# Altium PCB VECTOR_routed.PcbDoc (part 3 of 3)
Units mil, origin at the board's own origin, x right, y up, seen from the top; angles counter-clockwise.
Board outline 6000 x 4000 mil, 8 copper layers (Top Layer, Signal Layer 1, Signal Layer 2, Signal Layer 3, Signal Layer 4, VCC, Ground, Bottom Layer), stack 66.302 mil thick; 137 components, 274 nets, 1120 pads, 645 vias.
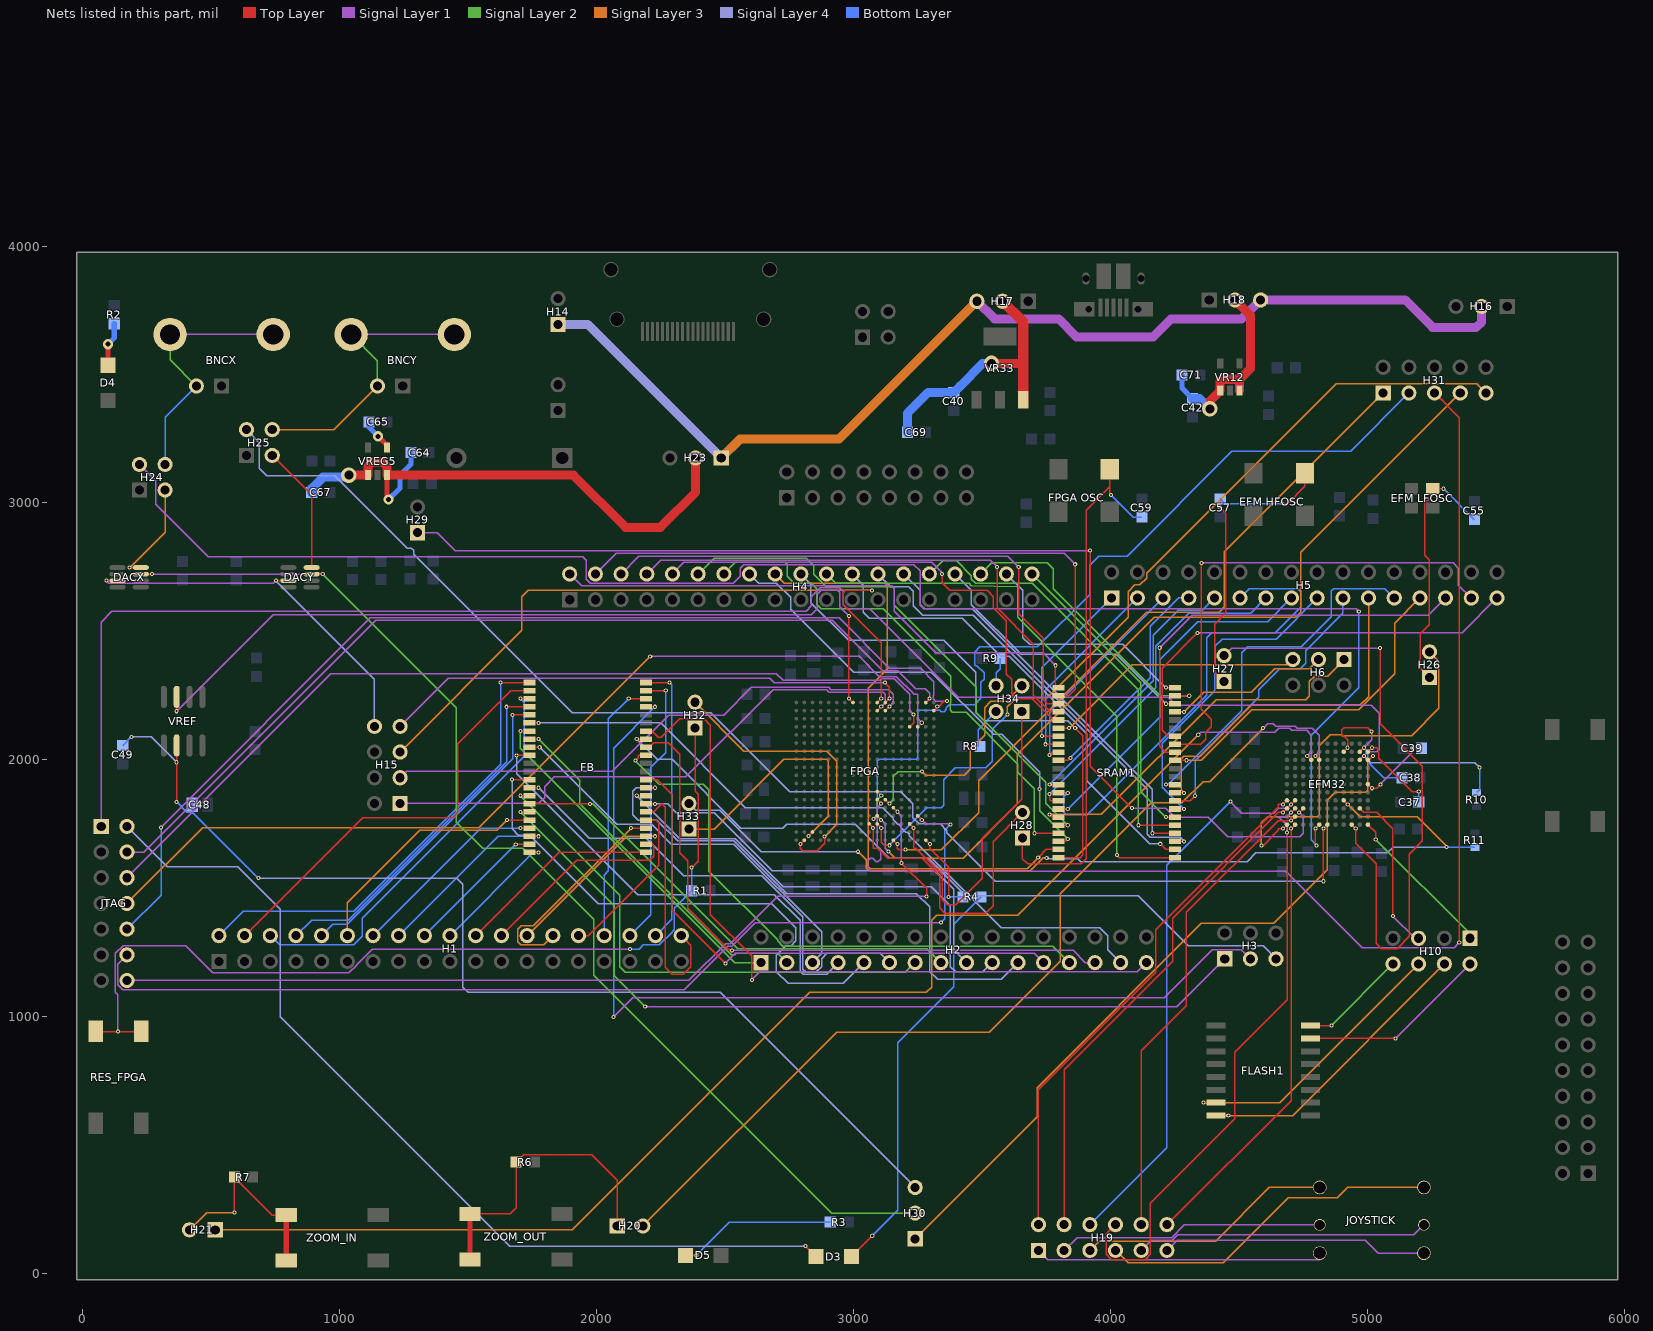
[diagram p9: the nets of this part, all layers, seen from the top]

## Via types
v1: diameter 16, hole 8, Top Layer to Bottom Layer, tented top, 295 vias
v2: diameter 16, hole 8, Top Layer to Bottom Layer, 264 vias
v3: diameter 40, hole 20, Top Layer to Bottom Layer, 75 vias
v4: diameter 60, hole 35, Top Layer to Bottom Layer, 10 vias
v5: diameter 40, hole 25, Top Layer to Bottom Layer, 1 vias

## Nets (pads, with @x,y where several pads share a name; then routed paths per layer and width w, separated by ;. In a path a pad name is that pad's centre, name@x,y a point inside that pad or via, vN(x,y) a via of type N, cw(c..) or ccw(c..) an arc to the next point about the centre after c; other vN are vias at no path point) (continued)
NetBNCX_2: BNCX.2 H24.4 | length 1000.1
  Signal Layer 1 w5: BNCX.2@339.21,3655.79 BNCX.2@740.79,3655.79
  Signal Layer 2 w5: BNCX.2@339.21,3655.79 339.21,3557.36 BNCX.2@441.57,3455
  Bottom Layer w5: H24.4@320,3150 320,3333.43 BNCX.2@441.57,3455
NetBNCY_2: BNCY.2 H25.4 | length 1124.8
  Signal Layer 1 w5: BNCY.2@1044.21,3655.79 BNCY.2@1445.79,3655.79
  Signal Layer 2 w5: BNCY.2@1044.21,3655.79 1146.57,3553.43 BNCY.2@1146.57,3455
  Signal Layer 3 w5: H25.4@737,3285 976.57,3285 BNCY.2@1146.57,3455
NetC37_1: C37.1 EFM32.B11 | length 335.4
  Top Layer w5: EFM32.B11@5002.48,2030.98 v1(5018.23,2046.73) 5036.34,2046.73 5045.28,2037.79 5045.28,2005 5174.28,1876 v2(5200.43,1876)
  Bottom Layer w5: C37.1@5200.43,1835 v2(5200.43,1876)
NetC38_2: C38.2 EFM32.B8 EFM32.B10 | length 543.9
  Top Layer w5: EFM32.B8@4907.99,2030.98 v1(4923.74,2046.73) 4923.74,2077.82 4901.56,2100 4901.56,2116 4910,2124.44 5002.56,2124.44 v2(5017,2110) ; EFM32.B10@4970.98,2030.98 v1(4986.73,2046.73) v1@4987,2047
  Signal Layer 1 w5: v1(4986.73,2046.73) 5002.48,2062.48 5017,2077 v2(5017,2110)
  Bottom Layer w5: v1@4987,2047 5002,2032 5002,1991.43 5063.43,1930 C38.2@5134.57,1930
NetC39_1: C39.1 EFM32.F11 | length 289.6
  Top Layer w5: EFM32.F11@5002.48,1905 v1(5018.23,1889.25) 5036.34,1889.25 v2(5051,1903.91)
  Signal Layer 1 w5: v2(5051,1903.91) 5174,2026.91 v2(5174,2045)
  Bottom Layer w5: v2(5174,2045) C39.1@5210.43,2045
NetC40_2: C40.2 C69.2 H17.2 VR33.3 | length 1135.4
  Top Layer w5: H17.2@3580,3785 3660.55,3704.45
  Top Layer w35: v4(3537,3543) 3660.55,3543
  Top Layer w40: H17.2@3580,3785 3660.55,3704.45 3660.55,3543 VR33.3@3660.55,3401.97
  Bottom Layer w35: C69.2@3209.57,3275 3209.57,3348.57 3291.43,3430.43 C40.2@3390,3430.43 3414.57,3455 3502.57,3543 v4(3537,3543)
NetC42_2: C42.2 C71.2 H18.2 VR12.1 VR12.3 | length 796.5
  Top Layer w5: v4@4387,3393.57 4391,3397.57
  Top Layer w35: v4(4387,3366) 4387,3396.25 VR12.1@4427.6,3436.85 4427.6,3472.6 4435,3480 4502.4,3480 ; H18.2@4485,3790 4546,3729 4546,3523.6 4502.4,3480 ; VR12.3@4502.4,3436.85 4502.4,3480
  Bottom Layer w20: C71.2@4278.57,3498 4278.57,3446.87 C42.2@4320,3405.43
  Bottom Layer w35: C42.2@4320,3405.43 4347.57,3405.43 v4(4387,3366)
NetC48_1: C48.1 C49.2 H30.3 VREF.6 | length 4243.9
  Top Layer w5: v2(365,1836) v2(365,1990.27) VREF.6@365,2055.51
  Signal Layer 4 w5: v2(188.57,2089) 266.27,2089 v2(365,1990.27) ; v2(682.94,1539) 1455,1539 1479,1515 1479,1115 1500,1094 2481,1094 H30.3@3240,335
  Bottom Layer w5: C49.2@155,2055.43 v2(188.57,2089) ; v2(365,1836) 404.53,1796.47 425.47,1796.47 ; C48.1@425.47,1825 425.47,1796.47 ; v2(682.94,1539) 425.47,1796.47
NetC55_2: "EFM LFOSC.3" C55.2 H26.1 | length 1004.3
  Top Layer w5: H26.1@5242.42,2320.16 5206,2356.58 5206,2490 5241,2525 5241,2778 5223,2796 5223,3009 5235,3009 5255.1,3029.1 5255.1,3054.97 v2(5297.18,3054.97)
  Bottom Layer w5: v2(5297.18,3054.97) C55.2@5417.42,2934.73
NetC57_2: "EFM HFOSC.3"@4757.42,3115.52 C57.2 H27.1 | length 1169.7
  Top Layer w5: v2(4427.42,2982) 4449.9,2959.52 4449.9,2571.9 4406,2528 4406,2341.58 H27.1@4442.42,2305.16 ; v2(4669,2997) 4690,2997 4757.42,3064.42 4757.42,3115.52
  Bottom Layer w5: v2(4427.42,2982) C57.2@4427.42,3015.6 4446.02,2997 v2(4669,2997)
NetC59_2: "FPGA OSC.3"@3997.42,3130.52 C59.2 H28.1 | length 2089.2
  Top Layer w5: H28.1@3657.42,1695.16 3657.42,1615 3677.42,1595 3886,1595 3906,1615 3906,2972 3997.42,3063.42 ; 3997.42,3130.52 3997.42,3063.42 ; v2(4003,3030) 3997.42,3035.58 3997.42,3063.42
  Bottom Layer w5: v2(4003,3030) 4088.27,2944.73 C59.2@4122.42,2944.73
NetC64_2: C64.2 C67.2 H23.2 VREG5.1 VREG5.3 | length 2203.8
  Top Layer w20: VREG5.3@1184.4,3107.87 1184.4,3018.6 v3(1190,3013)
  Top Layer w35: v4(1034.87,3107.87) 1065.87,3107.87 VREG5.1@1109.6,3107.87 1109.6,3142.6 1127,3160 1166,3160 1184.4,3141.6 VREG5.3@1184.4,3107.87 1909.54,3107.87 2112.4,2905 2248,2905 2385,3042 H23.2@2385,3175
  Bottom Layer w20: v3(1190,3013) 1234,3057 1234,3107 1276.57,3149.57 C64.2@1276.57,3196
  Bottom Layer w35: C67.2@890.57,3041 890.57,3055.57 934.97,3099.97 1026.97,3099.97 v4(1034.87,3107.87)
NetC65_2: C65.2 VREG5.4 | length 128.2
  Top Layer w20: v3(1149,3259) 1184.4,3223.6 VREG5.4@1184.4,3216.13
  Bottom Layer w20: C65.2@1113.57,3315 1113.57,3294.43 v3(1149,3259)
NetD3_1: D3.1 R4.1 | length 1609
  Top Layer w5: D3.1@2991.9,66 v2(3072.9,147)
  Bottom Layer w5: v2(3072.9,147) 3173,247.1 3173,899 3390,1116 3390,1359.57 R4.1@3496.43,1466
NetD3_2: D3.2 JTAG.2 | length 3621.9
  Top Layer w5: v2(2813.1,107) D3.2@2854.1,66
  Signal Layer 4 w5: JTAG.2@171.26,1740.55 327.81,1584 603,1584 769,1418 769,999 1661,107 v2(2813.1,107)
NetD4_1: D4.1 R2.1 | length 171.6
  Top Layer w20: D4.1@98,3535.9 v3(98,3618)
  Bottom Layer w20: v3(98,3618) 122,3642 R2.1@122,3697.57
NetD5_1: D5.1 R3.1 | length 617
  Top Layer w5: D5.1@2346.26,70.47 v2(2387.47,70.47)
  Bottom Layer w5: v2(2387.47,70.47) 2517,200 R3.1@2909.57,200
NetDACX_3: DACX.3 DACY.3 H30.2 | length 4476.7
  Top Layer w5: DACX.3@225.28,2722.8 v2(269,2722.8) ; DACY.3@890.28,2722.8 v2(933.71,2722.8)
  Signal Layer 1 w5: v2(269,2722.8) v2(933.71,2722.8)
  Signal Layer 2 w5: v2(933.71,2722.8) 1454,2202.51 1454,1757 1556,1655 1712,1655 1988,1379 1988,1162 2915,235 H30.2@3240,235
NetDACX_4: DACX.4 H24.3 | length 402.1
  Top Layer w5: v2(182,2748.39) DACX.4@225.28,2748.39
  Signal Layer 3 w5: v2(182,2748.39) 320,2886.39 H24.3@320,3050
NetDACY_4: DACY.4 H25.3 | length 500.1
  Top Layer w5: H25.3@737,3185 890.28,3031.72 DACY.4@890.28,2748.39
NetEFM32_C4: EFM32.C4 H21.1 | length 5348.7
  Top Layer w5: v1(4766.26,2015.24) EFM32.C4@4782.01,1999.49
  Signal Layer 1 w5: v2(4342.11,2097.38) 4351.48,2106.75 4427.25,2106.75 4427.88,2107.38 4639.46,2107.38 4654.46,2122.38 4697.38,2122.38 4705.54,2114.21 4764.13,2114.21 4782.01,2096.34 4782.01,2030.98 v1(4766.26,2015.24)
  Signal Layer 3 w5: H21.1@515,170 1905,170 2830,1095 3284,1095 3304,1115 3304,1375 3324,1395 3639.73,1395 v2(4342.11,2097.38)
NetEFM32_C5: EFM32.C5 H20.2 | length 3726
  Top Layer w5: v1(4797.76,2015.24) EFM32.C5@4813.5,1999.49
  Signal Layer 1 w5: v2(4594.15,2123.15) 4611.85,2140.85 4634,2140.85 4643.54,2131.31 4719,2131.31 4727.16,2123.15 4786.69,2123.15 4813.5,2096.34 4813.5,2030.98 v1(4797.76,2015.24)
  Signal Layer 3 w5: H20.2@2180,185 2935,940 3529,940 3804,1215 3804,1478 4158.44,1832.44 4278.24,1832.44 4360.8,1915 4386,1915 v2(4594.15,2123.15)
NetEFM32_C10: EFM32.C10 JTAG.1 R10.2 | length 6883.5
  Top Layer w5: EFM32.C10@4970.98,1999.49 v1(4986.73,2015.24)
  Signal Layer 1 w5: JTAG.1@71.26,1740.55 71.26,2536.26 113,2578 2815,2578 2836,2599 2836,2635.21 2869.98,2669.19 2945,2669.19 2959,2655.19 2959,2603 2975,2587 3063.56,2587 3407.47,2243.1 4224.9,2243.1 4255,2213 5015,2213 5046,2182 5046,2040.65 5036.34,2030.98 5002.48,2030.98 v1(4986.73,2015.24)
  Signal Layer 4 w5: v1(4986.73,2015.24) 5012.97,1989 5418,1989 v2(5437,1970)
  Bottom Layer w5: R10.2@5426,1872.56 5437,1883.56 v2(5437,1970)
NetEFM32_C11: EFM32.C11 H30.1 | length 2879
  Top Layer w5: EFM32.C11@5002.48,1999.49 5006.49,1999.49 v1(5022,2015)
  Signal Layer 3 w5: H30.1@3240,135 3715,610 3715,724 4354,1363 4635,1363 4844,1572 4844,1842 4875,1873 4995,1873 5002,1880 5002,1995 v1(5022,2015)
NetEFM32_H1: EFM32.H1 H19.2 | length 2063.4
  Top Layer w5: H19.2@3720,190 3720,716 4176,1172 4176,1338.24 4653.66,1815.91 4653.66,1826.26 v1(4671.77,1826.26) EFM32.H1@4687.52,1842.01
NetEFM32_H2: EFM32.H2 H19.6 | length 2164.1
  Top Layer w5: v1(4703.27,1826.26) EFM32.H2@4719.02,1842.01
  Signal Layer 1 w5: v2(4467.49,1837) 4511.86,1792.62 4635.77,1792.62 4653.66,1810.51 4687.52,1810.51 v1(4703.27,1826.26)
  Bottom Layer w5: H19.6@3920,190 4219,489 4219,1588.51 v2(4467.49,1837)
NetEFM32_H8: EFM32.H8 H33.2 R11.1 | length 3717.5
  Top Layer w5: EFM32.H8@4907.99,1842.01 v1(4924,1826)
  Signal Layer 3 w5: v2(3018,1642) 3049.06,1610.94 3049.06,1579.3 3061.3,1567.06 3687.48,1567.06 3738.42,1618 v2(3752,1618) ; v1(4924,1826) 4972,1778 5195,1778 5309,1664 v2(5309,1660)
  Signal Layer 4 w5: H33.2@2359,1830 2386.06,1802.94 2479.42,1802.94 2640.36,1642 v2(3018,1642) ; v2(3752,1618) 3752,1617 3754,1615 3873.72,1615 3885.16,1603.56 4533.15,1603.56 4566.65,1637.06 5078.7,1637.06 5101.64,1660 v2(5309,1660)
  Bottom Layer w5: v2(5309,1660) 5418.44,1660 R11.1@5419,1659.44
NetEFM32_J1: EFM32.J1 H19.4 | length 1990.5
  Top Layer w5: H19.4@3820,190 3820,793 4242,1215 4242,1383.1 4653.66,1794.76 v1(4671.77,1794.76) EFM32.J1@4687.52,1810.51
NetEFM32_J2: EFM32.J2 H19.8 | length 2336.3
  Top Layer w5: H19.8@4020,190 3984,154 3984,75 4005,54 4135,54 4156,75 4156,274 4484,602 4484,862 4688,1066 v1(4688,1717) ; v1(4703.27,1794.76) EFM32.J2@4719.02,1810.51
  Signal Layer 1 w5: v1(4688,1717) 4688,1744.68 4653.66,1779.02 4687.52,1779.02 v1(4703.27,1794.76)
NetEFM32_J3: EFM32.J3 H29.1 | length 4544.1
  Top Layer w5: v2(3921,2814) 3921,1975 v2(4084,1812) ; v1(4734.76,1794.76) EFM32.J3@4750.51,1810.51
  Signal Layer 1 w5: H29.1@1303,2884 1380,2884 1450,2814 v2(3921,2814) ; v2(4084,1812) 4215,1812 4250.94,1776.06 4380.94,1776.06 4456,1701 4737.85,1701 4750.51,1713.66 4750.51,1779.02 v1(4734.76,1794.76)
NetEFM32_K2: EFM32.K2 H19.10 | length 1866.2
  Top Layer w5: H19.10@4120,190 4120,867 4296,1043 4296,1405.61 4653.66,1763.27 v1(4703.27,1763.27) EFM32.K2@4719.02,1779.02
NetEFM32_L1: EFM32.L1 H26.2 | length 1498.1
  Top Layer w5: v2(4588,1666) 4594.66,1666 4653.66,1725 4653.66,1731.77 v1(4671.77,1731.77) EFM32.L1@4687.52,1747.52
  Signal Layer 3 w5: v2(4588,1666) 4588,1755 4612,1779 4807,1779 4813,1785 4813,2055 4855.71,2097.71 4897.85,2097.71 4901.56,2094 5173,2094 5279,2200 5279,2383.58 H26.2@5242.42,2420.16
NetEFM32_L2: EFM32.L2 H19.12 | length 1764.2
  Top Layer w5: H19.12@4220,190 4703.27,673.27 4703.27,1713.66 v1(4703.27,1731.77) EFM32.L2@4719.02,1747.52
NetEFM32_L5: EFM32.L5 H24.2 | length 6322.9
  Top Layer w5: v2(4803,1666) 4797.76,1671.24 4797.76,1713.66 v1(4797.76,1731.77) EFM32.L5@4813.5,1747.52
  Signal Layer 1 w5: H24.2@220,3150 284,3086 284,2995 488,2791 1945,2791 1959,2777 1959,2703 1975,2687 2531,2687 2559,2715 2559,2745 2573,2759 3235,2759 3259,2735 3259,2603 3275,2587 4957,2587 v2(4967,2577)
  Bottom Layer w5: v2(4803,1666) 4781,1688 4781,2095 4967,2281 v2(4967,2577)
NetEFM32_L6: EFM32.L6 H25.2 | length 5252.6
  Top Layer w5: v2(4829,1527) 4829.25,1527.25 4829.25,1713.66 v1(4829.25,1731.77) EFM32.L6@4845,1747.52
  Signal Layer 4 w5: H25.2@637,3285 687,3235 687,3134 715,3106 981,3106 1263.54,2823.46 1278.98,2823.46 1287.44,2815 1287.44,2799.56 1904,2183 2444,2183 2751,1876 3183,1876 3230,1829 3230,1775 3255,1750 3338,1750 3363.7,1724.3 3363.7,1715 3551.7,1527 v2(4829,1527)
NetEFM32_L9: EFM32.L9 H27.2 | length 2491.2
  Top Layer w5: EFM32.L9@4939.49,1747.52 v1(4955.24,1731.77) 4955.24,1713.66 4955.24,1675.76 5035,1596 5035,1285 5055,1265 5117,1265 5164,1312 5164,1633 5215,1684 5215,1975 5050,2140 v2(5050,2435)
  Signal Layer 1 w5: H27.2@4442.42,2405.16 4472.26,2435 v2(5050,2435)
NetFB_1: FB.1 H1.2 | length 1804.2
  Top Layer w5: v2(1626,2300.71) FB.1@1738.62,2300.71
  Bottom Layer w5: H1.2@529.33,1315.16 624.17,1410 1054,1410 1626,1982 v2(1626,2300.71)
NetFB_2: FB.2 H1.4 | length 1661.6
  Top Layer w5: H1.4@629.33,1315.16 1089.17,1775 1439,1775 1459,1795 1459,2063.21 1665,2269.21 FB.2@1738.62,2269.21
NetFB_3: FB.3 H1.6 | length 1615.8
  Top Layer w5: v2(1703.28,2238) 1703.57,2237.72 FB.3@1738.62,2237.72
  Bottom Layer w5: H1.6@729.33,1315.16 765.49,1279 1055,1279 1088,1312 1088,1383 1718,2013 1718,2223.28 v2(1703.28,2238)
NetFB_4: FB.4 H1.8 | length 1403.9
  Top Layer w5: v2(1649,2206.22) FB.4@1738.62,2206.22
  Bottom Layer w5: H1.8@829.33,1315.16 890.17,1376 1033,1376 1649,1992 v2(1649,2206.22)
NetFB_5: FB.5 H1.10 | length 1265.7
  Top Layer w5: v2(1673,2174.72) FB.5@1738.62,2174.72
  Bottom Layer w5: H1.10@929.33,1315.16 973.17,1359 1028.64,1359 1673,2003.36 v2(1673,2174.72)
NetFB_6: FB.18 H1.12 | length 970.8
  Top Layer w5: v2(1650.28,1765.28) FB.18@1738.62,1765.28
  Signal Layer 3 w5: H1.12@1029.33,1315.16 1029.33,1443.33 1312,1726 1611,1726 v2(1650.28,1765.28)
NetFB_7: FB.19 H1.14 | length 782.7
  Top Layer w5: v2(1703,1733.78) FB.19@1738.62,1733.78
  Bottom Layer w5: H1.14@1129.33,1315.16 1547.95,1733.78 v2(1703,1733.78)
NetFB_8: FB.20 H1.16 | length 740.4
  Top Layer w5: FB.20@1738.62,1702.28 1773.72,1702.28 v2(1774,1702)
  Bottom Layer w5: H1.16@1229.33,1315.16 1616.17,1702 v2(1774,1702)
NetFB_9: FB.21 H1.18 | length 556.6
  Top Layer w5: v2(1684.96,1670.79) FB.21@1738.62,1670.79
  Bottom Layer w5: H1.18@1329.33,1315.16 v2(1684.96,1670.79)
NetFB_10: FB.22 H1.20 | length 514.3
  Top Layer w5: FB.22@1738.62,1639.29 1773.71,1639.29 v2(1774,1639)
  Bottom Layer w5: H1.20@1429.33,1315.16 1753.17,1639 v2(1774,1639)
NetFB_11: FB.23 H1.22 | length 796.3
  Top Layer w5: H1.22@1529.33,1315.16 1853.46,1639.29 FB.23@2191.38,1639.29
NetFB_12: FB.24 H1.24 | length 794
  Top Layer w5: H1.24@1629.33,1315.16 1922.17,1608 2205,1608 2222,1625 2222,1665 2216.21,1670.79 FB.24@2191.38,1670.79
NetFB_13: FB.25 H1.26 | length 693.6
  Top Layer w5: FB.25@2191.38,1702.28 2226.72,1702.28 v2(2227,1702)
  Signal Layer 3 w5: H1.26@1729.33,1315.16 2116.17,1702 v2(2227,1702)
NetFB_14: FB.26 H1.28 | length 865.9
  Top Layer w5: v2(2133.78,1733.78) FB.26@2191.38,1733.78
  Signal Layer 3 w5: H1.28@1829.33,1315.16 1793.17,1279 1705,1279 1693.36,1290.64 1693.36,1339.36 1707,1353 1753,1353 v2(2133.78,1733.78)
NetFB_15: FB.27 H1.30 | length 646.4
  Top Layer w5: H1.30@1929.33,1315.16 1967.16,1315.16 2242,1590 2242,1755 2231.72,1765.28 FB.27@2191.38,1765.28
NetFB_16: FB.42 H1.32 | length 1028.6
  Top Layer w5: v2(2125,2237.72) FB.42@2191.38,2237.72
  Bottom Layer w5: H1.32@2029.33,1315.16 2029.33,1550.33 2046,1567 2046,2158.72 v2(2125,2237.72)
NetFB_17: FB.43 H1.34 | length 1090.6
  Top Layer w5: FB.43@2191.38,2269.21 2268.21,2269.21 v2(2269,2270)
  Bottom Layer w5: H1.34@2129.33,1315.16 2211,1396.83 2211,1970 2269,2028 v2(2269,2270)
NetFB_18: FB.44 H1.36 | length 1108.3
  Top Layer w5: FB.44@2191.38,2300.71 v2(2284,2300.71)
  Bottom Layer w5: H1.36@2229.33,1315.16 2293,1378.83 2293,2291.71 v2(2284,2300.71)
NetFB_19: FB.28 H1.38 | length 976.3
  Top Layer w5: FB.28@2191.38,1796.77 2223,1796.77 2254.23,1828 2255,1828 2267.56,1815.44 2267.56,1192.44 2295,1165 2337,1165 2367,1195 2367,1277.49 H1.38@2329.33,1315.16
NetFB_24: FB.7 H2.1 | length 1385.8
  Top Layer w5: v2(1703,2111.73) FB.7@1738.62,2111.73
  Signal Layer 2 w5: v2(1703,2111.73) 1703,2044 2537,1210 H2.1@2640,1210
NetFB_25: FB.8 H2.3 | length 1420.3
  Top Layer w5: FB.8@1738.62,2080.24 v2(1774,2080.24)
  Signal Layer 2 w5: v2(1774,2080.24) 1935,1919.24 1935,1828 2523,1240 2537,1240 2543,1246 2704,1246 H2.3@2740,1210
NetFB_26: FB.9 H2.5 | length 1570
  Top Layer w5: FB.9@1738.62,2048.74 v2(1778.26,2048.74)
  Signal Layer 4 w5: v2(1778.26,2048.74) 2078,1749 2214,1749 2291,1672 2534,1672 2876,1330 2876,1246 H2.5@2840,1210
NetFB_27: FB.10 H2.7 | length 1831.3
  Top Layer w5: v2(1688,2017.24) FB.10@1738.62,2017.24
  Signal Layer 4 w5: v2(1688,2017.24) 1688,1946 2159,1475 2692,1475 2791.92,1375.08 2791.92,1178.17 2805,1165.1 2895.1,1165.1 H2.7@2940,1210
NetFB_28: FB.13 H2.9 | length 2130.1
  Top Layer w5: v2(1671,1922.76) FB.13@1738.62,1922.76
  Signal Layer 4 w5: v2(1671,1922.76) 1671,1731 1695,1707 1739,1707 2006,1440 2681.93,1440 2775.97,1345.97 2775.97,1295 2755,1274.03 2735,1274.03 2700,1239.03 2700,1175 2745.44,1129.56 2959.56,1129.56 H2.9@3040,1210
NetFB_29: FB.14 H2.11 | length 1880.2
  Top Layer w5: FB.14@1738.62,1891.26 1773.74,1891.26 v2(1774,1891)
  Signal Layer 4 w5: v2(1774,1891) 1970.56,1694.44 2192.56,1694.44 2339,1548 2643,1548 2803,1388 2803,1185 2813.97,1174.03 2855,1174.03 2875.97,1195 2875.97,1225.97 2896,1246 3104,1246 H2.11@3140,1210
NetFB_30: FB.15 H2.13 | length 2036.9
  Top Layer w5: v2(1703,1860) 1703.24,1859.76 FB.15@1738.62,1859.76
  Signal Layer 2 w5: v2(1703,1860) 2090,1473 2090,1194 2112,1172 3202,1172 H2.13@3240,1210
NetFB_31: FB.16 H2.15 | length 1857.5
  Top Layer w5: FB.16@1738.62,1828.27 v2(1974.51,1828.27)
  Signal Layer 2 w5: v2(1974.51,1828.27) 1985.61,1828.27 2548.78,1265.1 3284.9,1265.1 H2.15@3340,1210
NetFB_32: FB.29 H2.17 | length 1642.3
  Top Layer w5: FB.29@2191.38,1828.27 2226.73,1828.27 v2(2227,1828)
  Signal Layer 4 w5: v2(2227,1828) 2276,1828 2310,1794 2457,1794 2683,1568 3316.89,1568 3390,1494.89 3390,1260 H2.17@3440,1210
NetFB_33: FB.30 H2.19 | length 1857.4
  Top Layer w5: v2(2156,1860) 2156.24,1859.76 FB.30@2191.38,1859.76
  Signal Layer 4 w5: v2(2156,1860) 2323,1693 2539,1693 2726,1506 3302,1506 3376,1432 3376,1195 3397,1174 3504,1174 H2.19@3540,1210
NetFB_34: FB.31 H2.21 | length 2158.2
  Top Layer w5: FB.31@2191.38,1891.26 2226.74,1891.26 v2(2227,1891)
  Signal Layer 4 w5: v2(2227,1891) 2155,1891 2141,1877 2141,1785 2161.5,1764.5 2234.5,1764.5 2315,1684 2534.64,1684 2739.64,1479 3245,1479 3297,1427 3297,1175 3327,1145 3575,1145 H2.21@3640,1210
NetFB_35: FB.32 H2.23 | length 2139.6
  Top Layer w5: FB.32@2191.38,1922.76 2235,1922.76 2292.44,1865.32 2292.44,1415.56 v2(2501,1207)
  Signal Layer 1 w5: v2(2501,1207) 2540,1246 3704,1246 H2.23@3740,1210
NetFB_36: FB.35 H2.25 | length 2257.8
  Top Layer w5: v2(2151,1997) 2161,2007 2161,2017.24 FB.35@2191.38,2017.24
  Signal Layer 2 w5: v2(2151,1997) 2243,1905 2415,1905 2437,1883 2437,1566 2704,1299 2704,1295 2724.97,1274.03 3775.97,1274.03 H2.25@3840,1210
NetFB_37: FB.36 H2.27 | length 2459
  Top Layer w5: FB.36@2191.38,2048.74 2204,2048.74 2222,2066.74 2278.32,2066.74 2323,2022.06 2323,1637 2354,1606 2354,1421 2526.84,1248.16 v2(2526.84,1258.16)
  Signal Layer 1 w5: v2(2526.84,1258.16) 3854.84,1258.16 3903,1210 H2.27@3940,1210
NetFB_38: FB.37 H2.29 | length 2325.3
  Top Layer w5: v2(2156,2080.24) FB.37@2191.38,2080.24
  Signal Layer 4 w5: v2(2156,2080.24) 2235.24,2001 2294,2001 2561.44,1733.56 2724.44,1733.56 2740.44,1749.56 3006.77,1749.56 3139.08,1617.26 3290.33,1617.26 3446.53,1461.06 3459.3,1461.06 3574.36,1346 3959,1346 3990,1315 3990,1260 H2.29@4040,1210
NetFB_39: FB.38 H2.31 | length 2924.1
  Top Layer w5: FB.38@2191.38,2111.73 2216.27,2111.73 2240,2088 2252,2088 2324,2160 2418,2160 2443,2135 2443,1397 2604,1236 v2(2604,1143)
  Signal Layer 1 w5: v2(2604,1143) 2635,1174 4104,1174 H2.31@4140,1210
NetFB_40: FB.17 H3.1 | length 3328.1
  Top Layer w5: v2(1703,1797) 1703.23,1796.77 FB.17@1738.62,1796.77
  Signal Layer 1 w5: v2(2189,1039) 4259,1039 H3.1@4445,1225
  Signal Layer 2 w5: v2(1703,1797) 2068,1432 2068,1160 v2(2189,1039)
NetFB_41: FB.41 H3.3 | length 3912
  Top Layer w5: FB.41@2191.38,2206.22 v2(2227,2206.22)
  Signal Layer 1 w5: v2(2066,999) 2141,1074 4210,1074 4397,1261 4509,1261 H3.3@4545,1225
  Bottom Layer w5: v2(2066,999) 2066,2045.22 v2(2227,2206.22)
NetFB_44: FB.6 H3.5 | length 3296.4
  Top Layer w5: FB.6@1738.62,2143.23 v2(1774,2143.23)
  Signal Layer 4 w5: v2(1774,2143.23) 2248.65,2143.23 2578.88,1813 3112.93,1813 3153.93,1772 3153.93,1766.3 3171.79,1748.44 3176.98,1748.44 3185.44,1739.98 3185.44,1734.79 3202.76,1717.47 3208.46,1717.47 3216.92,1709.01 3216.92,1703.31 3450.23,1470 4109,1470 4304,1275 4595,1275 H3.5@4645,1225
NetFLASH1_1: FLASH1.15 H10.2 | length 741.1
  Top Layer w5: FLASH1.15@4779.06,915 v2(5110,915)
  Signal Layer 1 w5: v2(5110,915) H10.2@5400,1205
NetFLASH1_2: FLASH1.8 H10.4 | length 1133.4
  Top Layer w5: FLASH1.8@4410.94,615 v2(4459,615)
  Signal Layer 3 w5: v2(4459,615) 4710,615 H10.4@5300,1205
NetFLASH1_5: FLASH1.7 H10.6 | length 1108.6
  Top Layer w5: v2(4363,665) FLASH1.7@4410.94,665
  Signal Layer 3 w5: v2(4363,665) 4660,665 H10.6@5200,1205
NetFLASH1_6: FLASH1.16 H10.8 | length 420.4
  Top Layer w5: FLASH1.16@4779.06,965 v2(4860,965)
  Signal Layer 2 w5: v2(4860,965) H10.8@5100,1205
NetFPGA_A8: FPGA.A8 VREF.3 | length 3319.4
  Top Layer w5: v2(365,2189) VREF.3@365,2244.49 ; v2(2982.01,2559.85) 2982.01,2254.8 v1(2982.01,2238.46) FPGA.A8@2997.76,2222.72
  Signal Layer 1 w5: v2(365,2189) 740,2564 2835,2564 2858.43,2587.43 2858.43,2645 2873.68,2660.25 2937.56,2660.25 2945.86,2651.95 2945.86,2596 v2(2982.01,2559.85)
NetFPGA_A11: FPGA.A11 H15.5 | length 2786.8
  Top Layer w5: v2(3072,2659) 2967,2659 2959.11,2651.11 2959.11,2603.89 3107.56,2455.44 3107.56,2286 3107.99,2254.8 v1(3107.99,2238.46) FPGA.A11@3092.24,2222.72
  Signal Layer 3 w5: H15.5@1235,2030 1709,2504 1709,2635 1733,2659 v2(3072,2659)
NetFPGA_A12: FPGA.A12 H15.7 | length 2062.9
  Top Layer w5: v2(3122,2300) 3139.49,2282.51 3139.49,2254.8 v1(3139.49,2238.46) FPGA.A12@3123.74,2222.72
  Signal Layer 1 w5: H15.7@1235,2130 1422,2317 2674,2317 2691.35,2299.65 3050.62,2299.65 ; 3050.65,2299.62 3121.62,2299.62 v2(3122,2300)
NetFPGA_A17: FPGA.A17 JTAG.4 | length 3658.2
  Top Layer w5: FPGA.A17@3281.22,2222.72 3296,2237.5 v1(3296,2238)
  Signal Layer 1 w5: JTAG.4@171.26,1640.55 237.55,1640.55 1140,2543 2918.02,2543 3114.02,2347 3171.62,2347 3243.06,2275.56 3278.73,2275.56 3296,2258.29 v1(3296,2238)
NetFPGA_B11: FPGA.B11 H15.1 | length 2181.5
  Top Layer w5: FPGA.B11@3092.24,2191.22 v1(3107.99,2206.97)
  Signal Layer 1 w5: H15.1@1235,1830 1775,1830 1797,1852 1797,1895 1835,1933 2347,1933 2686.84,2272.84 2895.04,2272.84 2904.14,2263.74 3114.8,2263.74 3123.74,2254.8 3123.74,2222.72 v1(3107.99,2206.97)
NetFPGA_B12: FPGA.B12 H15.3 | length 2153.7
  Top Layer w5: FPGA.B12@3123.74,2191.22 v1(3139.49,2206.97)
  Signal Layer 1 w5: H15.3@1235,1930 1260,1955 2061.12,1955 2280.12,2174 2494,2174 2601.78,2281.78 2902.72,2281.78 2911.38,2273.12 3136.91,2273.12 3155.24,2254.8 3155.24,2222.72 v1(3139.49,2206.97)
NetFPGA_B18: FPGA.B18 JTAG.10 | length 4088.9
  Top Layer w5: FPGA.B18@3312.72,2191.22 3326,2204.5 v1(3326,2207) ; v1@3331.03,2206.97 3352.06,2228 v2(3364,2228)
  Signal Layer 1 w5: v2(304,1737) 1119,2552 2944,2552 3140,2356 3261,2356 3313,2304 3313,2251.42 3310.56,2248.98 3310.56,2237.02 3319.58,2228 v2(3364,2228)
  Bottom Layer w5: JTAG.10@171.26,1340.55 304,1473.29 v2(304,1737)
NetFPGA_D15: FPGA.D15 JTAG.6 | length 3553.3
  Top Layer w5: FPGA.D15@3218.23,2128.23 3233.98,2143.98 v1(3233.98,2175.98)
  Signal Layer 1 w5: JTAG.6@171.26,1540.55 964.71,2334 2700,2334 2725.41,2308.59 3059.53,2308.59 ; 3059.56,2308.56 3103.62,2308.56 3109.94,2314.87 3158.16,2314.87 3218.23,2254.8 3218.23,2191.72 v1(3233.98,2175.98)
NetFPGA_D16: FPGA.D16 JTAG.8 | length 3677.7
  Top Layer w5: FPGA.D16@3249.72,2128.23 v1(3265.47,2143.98)
  Signal Layer 1 w5: v2(2208.44,2402.44) 3021.31,2402.44 3099.94,2323.81 3166.98,2323.81 3235.99,2254.8 3249.72,2254.8 3249.72,2159.72 v1(3265.47,2143.98)
  Signal Layer 3 w5: JTAG.8@171.26,1440.55 465.71,1735 1541,1735 v2(2208.44,2402.44)
NetFPGA_M11: FPGA.M11 H31.3 | length 3356.6
  Top Layer w5: FPGA.M11@3092.24,1876.26 v1(3107.99,1860.51)
  Signal Layer 2 w5: v1(3077,1769) 3092.24,1784.24 3092.24,1844.76 v1(3107.99,1860.51)
  Bottom Layer w5: v1(3077,1769) 3093,1785 3093,1822.58 3092.56,1823.02 3092.56,1994.56 3100,2002 3245,2002 3250,2007 3250,2187 3255,2192 3336.23,2192 3340.58,2187.65 3352.54,2187.65 3361,2196.1 3361,2203 3373,2215 3472,2215 3496,2239 3496,2301 3509,2314 3509,2338 3480.09,2366.91 3475.25,2366.91 3471.48,2370.68 3471.48,2419.32 3491.16,2439 3716,2439 3922,2645 3922,2760 3955,2793 4065,2793 4473,3201 4935,3201 H31.3@5162,3428
NetFPGA_N11: FPGA.N11 H31.5 | length 4962.1
  Top Layer w5: FPGA.N11@3092.24,1844.76 3107,1830.01 v1(3107,1829) ; H31.5@5262,3428 5358,3332 v2(5358,1289)
  Signal Layer 1 w5: v1(3107,1829) 3107,1828.02 3092.24,1813.27 3092.24,1655.2 3092.68,1654.76 3095,1654.76 3105.44,1644.32 3105.44,1613 3095,1602.56 3089,1602.56 3074.39,1617.17 3065,1617.17 3055,1607.17 3055,1579.42 3068.42,1566 4683,1566 4980,1269 5338,1269 v2(5358,1289)
NetFPGA_N12: FPGA.N12 H34.3 | length 899.6
  Top Layer w5: FPGA.N12@3123.74,1844.76 v1(3139.49,1829.02)
  Signal Layer 2 w5: v1(3139.49,1829.02) 3155.24,1844.76 3155.24,1935 3174.24,1954 v1(3267,1954)
  Signal Layer 3 w5: v1(3267,1954) 3281,1940 3431,1940 3455,1964 3455,2041 3510,2096 3510,2202 3535,2227 3594,2227 H34.3@3655,2288
NetFPGA_P13: FPGA.P13 JTAG.14 | length 3648.1
  Top Layer w5: FPGA.P13@3155.24,1813.27 v1(3170.98,1797.52) ; v2(3186.73,1597.64) 3284.57,1499.8 v2(3284.57,1468)
  Signal Layer 1 w5: JTAG.14@171.26,1140.55 171.26,1141 2359.14,1141 2501.57,1283.43 2519.43,1283.43 2704,1468 v2(3284.57,1468) ; v1(3170.98,1797.52) 3186.73,1781.77 3186.73,1655.2 v2(3186.73,1597.64)
NetFPGA_R11: FPGA.R11 H31.7 | length 3393.8
  Top Layer w5: FPGA.R11@3092.24,1781.77 3107,1767.02 v1(3107,1766)
  Signal Layer 1 w5: v1(3107,1766) 3108.02,1766 3123.74,1750.28 3123.74,1655.2 v2(3135.94,1643)
  Signal Layer 3 w5: v2(3135.94,1643) 3161.68,1617.26 3427.26,1617.26 3638,1828 3638,2022 4171,2555 4721,2555 4741,2575 4741,2807 H31.7@5362,3428
NetFPGA_R16: FPGA.R16 JTAG.12 | length 3992
  Top Layer w5: FPGA.R16@3249.72,1781.77 v1(3265.47,1766.02)
  Signal Layer 1 w5: JTAG.12@171.26,1240.55 135,1204.29 135,1124 155,1104 2340.57,1104 2510.78,1274.22 2525.22,1274.22 2616.86,1365.86 v2(3339.86,1365.86) ; v1(3265.47,1766.02) 3281.22,1750.28 3344.8,1750.28 3374.72,1750.28 v2(3377,1748)
  Bottom Layer w5: v2(3339.86,1365.86) 3354.73,1380.73 3354.73,1725.73 v2(3377,1748)
NetFPGA_T10: FPGA.T10 H28.2 | length 1169.5
  Top Layer w5: FPGA.T10@3060.75,1750.28 v1(3076.5,1734.53) 3076.5,1655.2 3095.35,1655.2 3133.55,1617 3267,1617 3335,1549 3335,1423 3355,1403 3515,1403 3543,1431 3543,1680.74 H28.2@3657.42,1795.16
NetFPGA_T11: FPGA.T11 H31.9 | length 3414.6
  Top Layer w5: FPGA.T11@3092.24,1750.28 v1(3107.99,1734.53) 3107.99,1678.8 3119.79,1667 v1(3140,1667)
  Signal Layer 3 w5: v2(3599,2176) 3599,2207 3633,2241 3755,2241 4069,2555 4069,2655 4095,2681 4115,2681 4141,2707 4141,2726 4879,3464 5426,3464 H31.9@5462,3428
  Bottom Layer w5: v1(3140,1667) 3286,1813 3341,1813 3351,1823 3351,1923 3396.56,1968.56 3514.56,1968.56 3541,1995 3541,2118 v2(3599,2176)
NetFPGA_T15: FPGA.T15 H34.1 | length 1273.1
  Top Layer w5: FPGA.T15@3218.23,1750.28 v1(3233.98,1734.53) 3233.98,1655.2 3242.8,1655.2 3345.51,1552.49 3345.51,1455 3365.51,1435 3397.51,1435 3502,1539.49 3502,1694 3655,1847 H34.1@3655,2188
NetFPGA_U3: FPGA.U3 H33.1 | length 1004.1
  Top Layer w5: v1(2824.53,1703.03) FPGA.U3@2840.28,1718.78
  Signal Layer 3 w5: H33.1@2359,1730 2457,1730 2728,2001 2896,2001 2902,1995 2902,1780.47 v1(2824.53,1703.03)
NetFPGA_V2: FPGA.V2 H32.2 | length 1133.7
  Top Layer w5: FPGA.V2@2808.78,1687.28 v1(2793.03,1671.54) 2793.03,1655.2 2802.23,1646 2858,1646 2887,1675 v1(2887,1701)
  Signal Layer 3 w5: H32.2@2383,2224 2573,2034 2895,2034 2934,1995 2934,1748 v1(2887,1701)
NetFPGA_V13: FPGA.V13 H31.1 | length 2867.1
  Top Layer w5: FPGA.V13@3155.24,1687.28 v1(3170.98,1671.54) 3170.98,1655.2 3176.18,1650 v2(3203,1650)
  Signal Layer 3 w5: v2(3203,1650) 3342.42,1650 3487,1794.58 3487,1919 4142,2574 4423,2574 4444,2595 4444,2810 H31.1@5062,3428
NetFPGA_V17: FPGA.V17 R4.2 | length 313.6
  Top Layer w5: FPGA.V17@3281.22,1687.28 v1(3296.97,1671.54) 3296.97,1655.2 3370,1582.17 v2(3370,1466)
  Bottom Layer w5: v2(3370,1466) R4.2@3425.57,1466
NetH4_2: H4.2 SRAM1.1 | length 2191.4
  Top Layer w5: v2(3786,2367.71) 3786,2280.71 SRAM1.1@3798.62,2280.71
  Signal Layer 1 w5: H4.2@1895.08,2723.03 1941.11,2677 2836.79,2677 2837.92,2678.13 3147.87,2678.13 3158.44,2667.56 3158.44,2577.56 3320,2416 3737.71,2416 v2(3786,2367.71)
NetH4_4: H4.4 SRAM1.2 | length 2480.1
  Top Layer w5: SRAM1.2@3798.62,2249.21 3837.21,2249.21 3863,2275 v2(3863,2761)
  Signal Layer 1 w5: H4.4@1995.08,2723.03 2075.73,2803.69 3820.31,2803.69 v2(3863,2761)
NetH4_6: H4.6 SRAM1.3 | length 2216.2
  Top Layer w5: v2(3643.02,2750.02) 3643.02,2567.98 3738,2473 3738,2234.72 3755,2217.72 SRAM1.3@3798.62,2217.72
  Signal Layer 1 w5: H4.6@2095.08,2723.03 2164.05,2792 3601.05,2792 v2(3643.02,2750.02)
NetH4_8: H4.8 SRAM1.4 | length 2080.4
  Top Layer w5: v2(3559,2751) 3559,2591.38 3699.9,2450.47 3699.9,2251.78 3765.47,2186.22 SRAM1.4@3798.62,2186.22
  Signal Layer 1 w5: H4.8@2195.08,2723.03 2248.92,2776.87 3533.13,2776.87 v2(3559,2751)
NetH4_10: H4.10 SRAM1.5 | length 1976.1
  Top Layer w5: v2(3345,2723) 3345,2689 3375,2659 3520,2659 3544,2635 3544,2592.44 3595,2541.44 3595,2332.9 3615,2312.9 3615,2258 3635,2238 3695.81,2238 3771.55,2162.26 SRAM1.5@3798.62,2154.72
  Signal Layer 1 w5: H4.10@2295.08,2723.03 2339.98,2767.94 3305,2767.94 3345,2727.94 v2(3345,2723)
NetH4_12: H4.12 SRAM1.18 | length 2095.3
  Top Layer w5: SRAM1.18@3798.62,1745.28 3833.72,1745.28 v2(3834,1745)
  Signal Layer 2 w5: H4.12@2395.08,2723.03 2457.05,2785 2816,2785 2846,2755 2846,2721.25 2893.25,2674 3152,2674 3158,2668 3158,2601.5 3477,2282.5 3477,2183 3748,1912 3748,1831 v2(3834,1745)
NetH4_14: H4.14 SRAM1.19 | length 2021.7
  Top Layer w5: v2(3704,1713.78) SRAM1.19@3798.62,1713.78
  Signal Layer 2 w5: H4.14@2495.08,2723.03 2540.05,2768 2735,2768 2741,2762 2741,2715 2769,2687 2835,2687 2857,2665 2857,2605 2875,2587 3116,2587 3378.44,2324.56 3378.44,2222.02 3376,2219.58 3376,2194 3385,2185 3438.12,2185 3640,1983.12 3640,1951 3704,1887 v2(3704,1713.78)
NetH4_16: H4.16 SRAM1.20 | length 1820.2
  Top Layer w5: SRAM1.20@3798.62,1682.28 3824.28,1682.28 v2(3834,1692)
  Signal Layer 2 w5: v2(3724,1886) 3724,1802 v2(3834,1692)
  Signal Layer 4 w5: H4.16@2595.08,2723.03 2631.11,2687 2700,2687 2755,2632 2755,2585.93 2999.93,2341 3303.38,2341 3545.38,2099 3577,2099 3724,1952 v2(3724,1886)
NetH4_18: H4.18 SRAM1.21 | length 2355.7
  Top Layer w5: v2(3719,1619) 3750.79,1650.79 SRAM1.21@3798.62,1650.79
  Signal Layer 3 w5: H4.18@2695.08,2723.03 2731.11,2687 3123,2687 3132,2678 3132,2352.12 3058,2278.12 3058,1583 3065,1576 3676,1576 v2(3719,1619)
NetH4_20: H4.20 SRAM1.22 | length 2053
  Top Layer w5: SRAM1.22@3798.62,1619.29 3882,1619.29 3892,1629.29 3892,2094 v2(3863,2123)
  Signal Layer 4 w5: H4.20@2795.08,2723.03 2834.17,2683.94 2834.17,2611.83 2981,2465 3351,2465 3475.5,2340.5 3475.5,2185 3508.94,2151.56 3834.44,2151.56 v2(3863,2123)
NetH4_22: H4.22 SRAM1.23 | length 2197.3
  Top Layer w5: v2(4025,1629.29) 4035,1619.29 SRAM1.23@4251.38,1619.29
  Signal Layer 2 w5: H4.22@2895.08,2723.03 2931.11,2687 3450.17,2687 3459.05,2678.13 3640,2673 3640,2554 4025,2169 v2(4025,1629.29)
NetH4_24: H4.24 SRAM1.24 | length 1868.5
  Top Layer w5: v2(4194,1672.79) 4216,1650.79 SRAM1.24@4251.38,1650.79
  Signal Layer 4 w5: H4.24@2995.08,2723.03 3038,2680.11 3038,2575 3062,2551 3423.7,2551 3572.34,2402.35 3606.3,2402.35 3908,2100.65 3908,1918.79 4154,1672.79 v2(4194,1672.79)
NetH4_26: H4.26 SRAM1.25 | length 1794.5
  Top Layer w5: SRAM1.25@4251.38,1682.28 v2(4287,1682.28)
  Signal Layer 4 w5: H4.26@3095.08,2723.03 3145.11,2673 3215,2673 3232,2656 3232,2600 3269.36,2562.64 3466.36,2562.64 4143,1886 4143,1710 4155,1698 4271.28,1698 v2(4287,1682.28)
NetH4_28: H4.28 SRAM1.26 | length 1608
  Top Layer w5: v2(4163.22,1713.78) SRAM1.26@4251.38,1713.78
  Signal Layer 4 w5: H4.28@3195.08,2723.03 3259,2659.11 3259,2603 3275,2587 3462,2587 4163.22,1885.78 v2(4163.22,1713.78)
NetH4_30: H4.30 SRAM1.27 | length 1722
  Top Layer w5: v2(4109,1745) 4109.28,1745.28 SRAM1.27@4251.38,1745.28
  Signal Layer 2 w5: H4.30@3295.08,2723.03 3347.05,2775 3400.89,2775 3459.11,2716.78 3459.11,2702.95 3475,2687.07 3695,2687.07 4109,2273.07 v2(4109,1745)
NetH4_32: H4.32 SRAM1.42 | length 1097.9
  Top Layer w5: v2(4216,2218) 4216.28,2217.72 SRAM1.42@4251.38,2217.72
  Signal Layer 4 w5: H4.32@3395.08,2723.03 3459,2659.11 3459,2604 3652,2411 4023,2411 v2(4216,2218)
NetH4_34: H4.34 SRAM1.43 | length 1145.1
  Top Layer w5: SRAM1.43@4251.38,2249.21 v2(4307,2249.21)
  Signal Layer 2 w5: H4.34@3495.08,2723.03 3538.05,2766 3755,2766 3778,2743 3778,2665 4193.79,2249.21 v2(4307,2249.21)
NetH4_36: H4.36 SRAM1.44 | length 947.3
  Top Layer w5: v2(4216,2281) 4216.29,2280.71 SRAM1.44@4251.38,2280.71
  Signal Layer 4 w5: H4.36@3595.08,2723.03 3659.11,2659 3659.11,2475 3685.11,2449 4048,2449 v2(4216,2281)
NetH4_38: H4.38 SRAM1.28 | length 1197.3
  Top Layer w5: v2(4216,1777) 4216.23,1776.77 SRAM1.28@4251.38,1776.77
  Signal Layer 2 w5: H4.38@3695.08,2723.03 4118,2300.11 4118,1875 v2(4216,1777)
NetH5_1: H5.1 SRAM1.7 | length 716.6
  Top Layer w5: v2(3733,2091.73) SRAM1.7@3798.62,2091.73
  Bottom Layer w5: v2(3733,2091.73) 3733,2358 H5.1@4005,2630
NetH5_3: H5.3 SRAM1.8 | length 768.3
  Top Layer w5: v2(3748,2060.24) SRAM1.8@3798.62,2060.24
  Bottom Layer w5: v2(3748,2060.24) 3748,2273 H5.3@4105,2630
NetH5_5: H5.5 SRAM1.9 | length 833.7
  Top Layer w5: v2(3763,2019) 3772.74,2028.74 SRAM1.9@3798.62,2028.74
  Bottom Layer w5: v2(3763,2019) 3763,2188 H5.5@4205,2630
NetH5_7: H5.7 SRAM1.10 | length 885.6
  Top Layer w5: SRAM1.10@3798.62,1997.24 3834.24,1997.24 v2(3844,2007)
  Bottom Layer w5: v2(3844,2007) 4156,2319 4156,2519 4267,2630 H5.7@4305,2630
NetH5_9: H5.9 SRAM1.13 | length 1081.2
  Top Layer w5: v2(3763.73,1903.73) 3764.71,1902.76 SRAM1.13@3798.62,1902.76
  Bottom Layer w5: v2(3763.73,1903.73) 4166.6,2306.6 4166.6,2483.8 4264.81,2582 4357,2582 H5.9@4405,2630
NetH5_11: H5.11 SRAM1.14 | length 1826.8
  Top Layer w5: SRAM1.14@3798.62,1871.26 v2(3834,1871.26)
  Bottom Layer w5: v2(3834,1871.26) 3819,1856.26 3819,1795 3829,1785 3909,1785 4375,2251 4375,2474 4395,2494 4642,2494 4741,2593 4741,2655 4730,2666 4541,2666 H5.11@4505,2630
NetH5_13: H5.13 SRAM1.15 | length 1312.4
  Top Layer w5: v2(3763,1867) 3763,1845 3768.24,1839.76 SRAM1.15@3798.62,1839.76
  Bottom Layer w5: v2(3763,1867) 4176,2280 4176,2441.37 4305.63,2571 4546,2571 H5.13@4605,2630
NetH5_15: H5.15 SRAM1.16 | length 1377.2
  Top Layer w5: SRAM1.16@3798.62,1808.27 v2(3834,1808.27)
  Bottom Layer w5: v2(3834,1808.27) 4191.56,2165.83 4191.56,2388.56 4340,2537 4612,2537 H5.15@4705,2630
NetH5_17: H5.17 SRAM1.29 | length 1266.1
  Top Layer w5: SRAM1.29@4251.38,1808.27 4286.73,1808.27 v2(4287,1808)
  Bottom Layer w5: v2(4287,1808) 4201.56,1893.44 4201.56,2064.56 4406,2269 4406,2441 4435,2470 4645,2470 H5.17@4805,2630
NetH5_19: H5.19 SRAM1.30 | length 1142.1
  Top Layer w5: SRAM1.30@4251.38,1839.76 4310,1839.76 v2(4330,1859.76)
  Bottom Layer w5: v2(4330,1859.76) 4330,1996 4576.83,2242.83 4576.83,2271.69 4659.14,2354 4739,2354 4760,2375 4760,2425 4905,2570 H5.19@4905,2630
NetH5_21: H5.21 SRAM1.31 | length 1385.6
  Top Layer w5: SRAM1.31@4251.38,1871.26 v2(4286,1871.26)
  Signal Layer 3 w5: v2(4286,1871.26) 4275,1882.26 4275,2003 4285,2013 4349,2013 4550.44,2214.44 4973.44,2214.44 5005,2246 H5.21@5005,2630
NetH5_23: H5.23 SRAM1.32 | length 1444.9
  Top Layer w5: v2(4216.73,1903) 4216.98,1902.76 SRAM1.32@4251.38,1902.76
  Bottom Layer w5: v2(4216.73,1903) 4224,1903 4512,2191 4512,2417 4535,2440 4743,2440 4860,2557 4860,2657 4869,2666 5069,2666 H5.23@5105,2630
NetH5_25: H5.25 SRAM1.35 | length 1331.1
  Top Layer w5: SRAM1.35@4251.38,1997.24 4296.24,1997.24 v2(4297,1998)
  Signal Layer 3 w5: v2(4297,1998) 4354.12,1998 4550.56,2194.44 4966.44,2194.44 5106.3,2334.3 5106.3,2531.3 H5.25@5205,2630
NetH5_27: H5.27 SRAM1.36 | length 1646.5
  Top Layer w5: v2(4192,2436) 4192,2051.74 4215,2028.74 SRAM1.36@4251.38,2028.74
  Signal Layer 1 w5: v2(4192,2436) 4318.56,2562.56 5237.56,2562.56 H5.27@5305,2630
NetH5_29: H5.29 SRAM1.37 | length 1985.9
  Top Layer w5: SRAM1.37@4251.38,2060.24 4352,2060.24 4371,2079.24 4371,2106.75 4393.44,2129.19 4393.44,2157.56 4354,2197 v2(4354,2766)
  Signal Layer 1 w5: v2(4354,2766) 5335,2766 5355,2746 5355,2680 H5.29@5405,2630
NetH5_31: H5.31 SRAM1.38 | length 1718.5
  Top Layer w5: SRAM1.38@4251.38,2091.73 4224.27,2091.73 4201,2115 4201,2356 v2(4339.01,2494.01)
  Signal Layer 1 w5: v2(4339.01,2494.01) 5369.01,2494.01 H5.31@5505,2630
NetH6_1: H6.1 SRAM1.17 | length 1470.6
  Top Layer w5: v2(3763,1787) 3773.23,1776.77 SRAM1.17@3798.62,1776.77
  Signal Layer 3 w5: v2(3763,1787) 3965,1787 4411.62,2233.62 4760.58,2233.62 4774.03,2247.07 4774.03,2305 4795,2325.97 4845.97,2325.97 H6.1@4910,2390
NetH6_3: H6.3 SRAM1.41 | length 643.2
  Top Layer w5: SRAM1.41@4251.38,2186.22 4286.78,2186.22 v2(4287,2186)
  Signal Layer 3 w5: v2(4287,2186) 4363,2262 4548,2262 4640,2354 4774,2354 H6.3@4810,2390
NetH6_5: H6.5 SRAM1.6 | length 1021.9
  Top Layer w5: SRAM1.6@3798.62,2123.23 v2(3839,2123.23)
  Signal Layer 3 w5: v2(3839,2123.23) 4084.77,2369 4689,2369 H6.5@4710,2390
NetH14_1: H14.1 H16.2 H17.3 H18.3 H23.1 | length 4294.3
  Signal Layer 1 w35: H17.3@3480,3785 3549,3716 3798,3716 3868,3646 4166,3646 4236,3716 4511,3716 H18.3@4585,3790 5147,3790 5254,3683 5424,3683 5445,3704 H16.2@5445,3765
  Signal Layer 3 w35: H23.1@2485,3175 2558,3248 2943,3248 H17.3@3480,3785
  Signal Layer 4 w35: H14.1@1850,3695 1965,3695 H23.1@2485,3175
NetH19_1: H19.1 JOYSTICK.3 | length 1135
  Signal Layer 1 w5: H19.1@3720,90 3756,54 4815,54 JOYSTICK.3@4815,79.09
NetH19_3: H19.3 JOYSTICK.2 | length 1036.1
  Signal Layer 1 w5: H19.3@3820,90 3870,140 4238.97,140 4288.3,189.33 JOYSTICK.2@4815,189.33
NetH19_5: H19.5 JOYSTICK.1 | length 996.5
  Signal Layer 3 w5: H19.5@3920,90 3956,126 4410,126 4619,335 JOYSTICK.1@4815,335
NetH19_7: H19.7 JOYSTICK.6 | length 1342.6
  Signal Layer 3 w5: H19.7@4020,90 4069,41 4439,41 4693,295 4884,295 4924,335 JOYSTICK.6@5220.51,335
NetH19_9: H19.9 JOYSTICK.5 | length 1141.7
  Signal Layer 1 w5: H19.9@4120,90 4159.18,129.18 4241.42,129.18 4262.24,150 5181.18,150 JOYSTICK.5@5220.51,189.33
NetH19_11: H19.11 JOYSTICK.4 | length 1038.2
  Signal Layer 1 w5: H19.11@4220,90 4260,130 4992,130 5042.91,79.09 JOYSTICK.4@5220.51,79.09
NetH20_1: H20.1 R6.1 ZOOM_OUT.1 ZOOM_OUT.3 | length 1170.3
  Top Layer w5: ZOOM_OUT.3@1506.73,232.17 1663.73,232.17 1686.57,255 R6.1@1686.57,434 1715.57,463 1980,463 2080,363 H20.1@2080,185
  Top Layer w20: ZOOM_OUT.1@1506.73,55 1506.73,142.73 ZOOM_OUT.3@1506.73,232.17
NetH21_2: H21.2 R7.1 ZOOM_IN.1 ZOOM_IN.3 | length 780.9
  Top Layer w5: v2(589.57,237) R7.1@589.57,375 737.4,227.17 ZOOM_IN.3@791.73,227.17
  Top Layer w20: ZOOM_IN.1@791.73,50 791.73,142.73 ZOOM_IN.3@791.73,227.17
  Signal Layer 3 w5: H21.2@415,170 482,237 v2(589.57,237)
NetH32_1: H32.1 R1.1 RES_FPGA.1 RES_FPGA.3 | length 3616.2
  Top Layer w5: RES_FPGA.1@51.27,942 v2(136,942) RES_FPGA.3@225.9,942 ; v2(2369.57,1580) 2395,1605.43 2395,1866 2383,1878 H32.1@2383,2124
  Signal Layer 1 w5: v2(136,942) 136,1085.13 126.06,1095.06 126.06,1246.22 156.36,1276.52 399.81,1276.52 506.27,1170.06 1035.1,1170.06 1065.29,1200.26 1065.29,1201.98 1126.31,1263 v2(2130,1263)
  Bottom Layer w5: v2(2130,1263) 2165,1263 2181.19,1279.19 2244.23,1279.19 2293.37,1328.33 2293.37,1330.05 2301.94,1338.63 2301.94,1422.37 R1.1@2369.57,1490 v2(2369.57,1580)
NetH34_2: H34.2 R8.1 | length 165.2
  Bottom Layer w5: R8.1@3484.56,2052 3484.56,2117.56 H34.2@3555,2188
NetH34_4: H34.4 R9.1 | length 113.4
  Bottom Layer w5: H34.4@3555,2288 3555,2339 3570.43,2354.43 R9.1@3570.43,2395
SPI.CS: EFM32.J10 H10.5 | length 637.6
  Top Layer w5: EFM32.J10@4970.98,1810.51 4986.73,1794.76 5036.34,1794.76 5100,1731.1 v2(5100,1391)
  Signal Layer 1 w5: v2(5100,1391) 5186,1305 H10.5@5200,1305
SPI.TX: EFM32.L11 H10.1 | length 607.2
  Top Layer w5: EFM32.L11@5002.48,1747.52 5033,1717 v2(5033,1689)
  Signal Layer 2 w5: v2(5033,1689) 5400,1322 H10.1@5400,1305
SYNC: DACX.7 DACY.7 H15.8 | length 1486.3
  Top Layer w5: v2(91,2697.2) DACX.7@134.72,2697.2 ; v2(751,2697.2) DACY.7@799.72,2697.2
  Signal Layer 1 w5: v2(91,2697.2) 100.2,2688 741.8,2688 v2(751,2697.2)
  Signal Layer 4 w5: v2(751,2697.2) 1135,2313.2 H15.8@1135,2130
pads on no net: "ARM 20.2" "ARM 20.3" "ARM 20.5" "ARM 20.11" "ARM 20.17" "ARM 20.19" "EFM HFOSC.1" "EFM HFOSC.3"@4502.42,2895.16 "EFM LFOSC.1" "FPGA OSC.1" "FPGA OSC.3"@3742.42,2910.16 EFM32.A6 EFM32.A8 EFM32.A10 EFM32.A11 EFM32.B5 EFM32.B7 EFM32.C6 EFM32.D3 EFM32.D11 EFM32.E5 EFM32.E6 EFM32.E7 EFM32.F5 EFM32.F6 EFM32.F7 EFM32.G5 EFM32.G6 EFM32.G7 EFM32.H3 EFM32.H9 EFM32.H10 EFM32.H11 EFM32.J11 EFM32.K1 EFM32.L8 FLASH1.1 FLASH1.3 FLASH1.4 FLASH1.5 FLASH1.6 FLASH1.9 FLASH1.11 FLASH1.12 FLASH1.13 FLASH1.14 FPGA.A5 FPGA.A7 FPGA.A9 FPGA.A10 FPGA.A13 FPGA.A14 FPGA.A15 FPGA.A16 FPGA.B8 FPGA.B9 FPGA.B14 FPGA.B16 FPGA.C1 FPGA.C2 FPGA.C4 FPGA.C5 FPGA.C6 FPGA.C7 FPGA.C8 FPGA.C9 FPGA.C10 FPGA.C11 FPGA.C12 FPGA.C13 FPGA.C14 FPGA.C15 FPGA.D1 FPGA.D2 FPGA.D3 FPGA.D6 FPGA.D8 FPGA.D9 FPGA.D11 FPGA.D12 FPGA.D14 FPGA.E1 FPGA.E3 FPGA.E4 FPGA.E6 FPGA.E7 FPGA.E8 FPGA.E11 FPGA.E12 FPGA.E13 FPGA.F1 FPGA.F2 FPGA.F3 FPGA.F4 FPGA.F5 FPGA.F6 FPGA.F7 FPGA.F8 FPGA.F9 FPGA.F10 FPGA.F11 FPGA.F12 FPGA.F13 FPGA.G6 FPGA.G8 FPGA.G9 FPGA.G11 FPGA.H5 FPGA.H6 FPGA.H7 FPGA.L14 FPGA.M8 FPGA.M10 FPGA.M13 FPGA.M14 FPGA.N5 FPGA.N6 FPGA.N7 FPGA.N8 FPGA.N9 FPGA.N10 FPGA.N14 FPGA.N15 FPGA.N16 FPGA.P6 FPGA.P7 FPGA.P8 FPGA.P11 FPGA.P12 FPGA.P15 FPGA.P16 FPGA.P17 FPGA.P18 FPGA.R3 FPGA.R5 FPGA.R7 FPGA.R8 FPGA.R10 FPGA.T3 FPGA.T4 FPGA.T5 FPGA.T6 FPGA.T7 FPGA.T8 FPGA.T9 FPGA.T12 FPGA.T13 FPGA.T14 FPGA.T17 FPGA.T18 FPGA.U5 FPGA.U7 FPGA.U8 FPGA.U10 FPGA.U11 FPGA.U13 FPGA.U15 FPGA.U16 FPGA.U17 FPGA.U18 FPGA.V3 FPGA.V4 FPGA.V5 FPGA.V6 FPGA.V7 FPGA.V8 FPGA.V9 FPGA.V10 FPGA.V11 FPGA.V12 FPGA.V14 FPGA.V15 FPGA.V16 H12.2 H13.1 H13.3 HDMI. HDMI.19 PSU. PSU.2 PSU.3 PSU.4 VR12.4 VR33.4 VREF.1 VREF.5 VREF.7 VREF.8
copper on no net: | length 47.7
  Bottom Layer w5: 3443,2172.57 3443,2148.97 3453,2138.97 v2(3453,2128.97)

## Polygon pours and split planes (outlines as drawn)
A5V on VCC (split plane): 1666.92,3010.68 1398.32,2742.08 -4.9,2742.08 -4.9,3954.9 1666.92,3954.9
3.3V on VCC (split plane): 5954.9,-4.9 -4.9,-4.9 -4.9,2733.92 1400.01,2733.92 1401.57,2734.23 1402.89,2735.12 1673.88,3006.11 1674.33,3006.77 1674.77,3007.43 1675.08,3008.99 1675.08,3954.9 5954.9,3954.9
AGND on Ground (split plane): 1667.58,3011.34 1397.92,2741.68 -4.9,2741.68 -4.9,3954.9 1667.58,3954.9
GND on Ground (split plane): 5954.9,-4.9 -4.9,-4.9 -4.9,2733.52 1399.61,2733.52 1401.17,2733.83 1402.49,2734.71 1674.54,3006.76 1674.98,3007.42 1675.42,3008.09 1675.73,3009.65 1675.73,3954.9 5954.9,3954.9

## Other copper
Ground (plane layer: these items are gaps in the copper):
  lines w8: 1671.65,3959.45 1671.65,3009.65 1399.61,2737.6 -16.34,2737.6 -33.66,2754.92 -33.66,3966.34 -25,3975 1673.43,3975
VCC (plane layer: these items are gaps in the copper):
  lines w8: -25,2738 1400.01,2738 1671,3008.99 1671,3976.77 -23.23,3976.77 -25,3975 -25,2738

## Silkscreen, mask and mechanical layers (free items; w line width, h text height)
Top Overlay:
  drawing of 2051 lines, arcs and shapes, not listed
  text "Christian De Frene" at 770,1050 h60
  text "Datamaskinprosjekt 2015" at 2330,1010 h60
  text "O" at 760,940 h60
  text "yvind Robertsen" at 820,920 h60
  text "Helmer Nj" at 770,840 h60
  text "a" at 1280,840 h60
  text "e" at 1320,840 h60
  text "rheim" at 1380,840 h60
  text "Jonas Halland" at 770,745 h60
  text "Jonatan Lund" at 770,640 h60
  text "Havard Lian" at 770,530 h60
  text "Anders Lima" at 770,430 h60
Mechanical 1:
  lines w8: -10,-10 5960,-10 5960,3960 -10,3960 -10,-10

## Text inside footprints (layer, text, board x,y; h text height)
"ARM 20": Top Overlay "20" at 5780,1350 h50 r90; Top Overlay "19" at 5880,1350 h50 r90; Top Overlay "1" at 5880,290 h50 r90; Top Overlay "2" at 5780,290 h50 r90
H1: Top Overlay "2" at 429.33,1295.16 h50; Top Overlay "1" at 429.33,1195.16 h50; Top Overlay "37" at 2389.33,1195.16 h50; Top Overlay "38" at 2389.33,1295.16 h50
H2: Top Overlay "2" at 2540,1290 h50; Top Overlay "1" at 2540,1190 h50; Top Overlay "31" at 4200,1190 h50; Top Overlay "32" at 4200,1290 h50
H3: Top Overlay "6" at 4705,1305 h50; Top Overlay "5" at 4705,1205 h50; Top Overlay "2" at 4345,1305 h50; Top Overlay "1" at 4365,1205 h50
H4: Top Overlay "2" at 1795.08,2703.03 h50; Top Overlay "1" at 1795.08,2603.03 h50; Top Overlay "37" at 3755.08,2603.03 h50; Top Overlay "38" at 3755.08,2703.03 h50
H5: Top Overlay "2" at 3905,2710 h50; Top Overlay "1" at 3905,2610 h50; Top Overlay "31" at 5565,2610 h50; Top Overlay "32" at 5565,2710 h50
H6: Top Overlay "6" at 4650,2310 h50 r180; Top Overlay "5" at 4650,2410 h50 r180; Top Overlay "2" at 5010,2310 h50 r180; Top Overlay "1" at 4990,2410 h50 r180
H10: Top Overlay "2" at 5500,1225 h50 r180; Top Overlay "1" at 5480,1325 h50 r180; Top Overlay "7" at 5040,1325 h50 r180; Top Overlay "8" at 5040,1225 h50 r180
H11: Top Overlay "2" at 2640,3100 h50; Top Overlay "1" at 2640,3000 h50; Top Overlay "15" at 3500,3000 h50; Top Overlay "16" at 3500,3100 h50
H13: Top Overlay "1" at 2955,3625 h50; Top Overlay "2" at 2935,3725 h50; Top Overlay "4" at 3195,3725 h50; Top Overlay "3" at 3195,3625 h50
H15: Top Overlay "2" at 1155,1730 h50 r90; Top Overlay "1" at 1255,1750 h50 r90; Top Overlay "7" at 1255,2190 h50 r90; Top Overlay "8" at 1155,2190 h50 r90
H19: Top Overlay "12" at 4300,170 h50; Top Overlay "1" at 4340,70 h50; Top Overlay "1" at 4300,70 h50; Top Overlay "1" at 3620,70 h50; Top Overlay "2" at 3620,170 h50
H24: Top Overlay "3" at 380,3030 h50; Top Overlay "4" at 380,3130 h50; Top Overlay "2" at 120,3130 h50; Top Overlay "1" at 140,3030 h50
H25: Top Overlay "3" at 797,3165 h50; Top Overlay "4" at 797,3265 h50; Top Overlay "2" at 537,3265 h50; Top Overlay "1" at 557,3165 h50
H31: Top Overlay "2" at 4962,3508 h50; Top Overlay "1" at 4982,3408 h50; Top Overlay "9" at 5522,3408 h50; Top Overlay "10" at 5522,3508 h50
H34: Top Overlay "1" at 3675,2108 h50 r90; Top Overlay "2" at 3575,2088 h50 r90; Top Overlay "4" at 3575,2348 h50 r90; Top Overlay "3" at 3675,2348 h50 r90
JTAG: Top Overlay "2" at 151.26,1860.55 h50 r270; Top Overlay "1" at 51.26,1860.55 h50 r270; Top Overlay "14" at 151.26,1060.55 h50 r270; Top Overlay "13" at 51.26,1060.55 h50 r270